# EAGLE board PC817 (EAGLE 9.5.0)
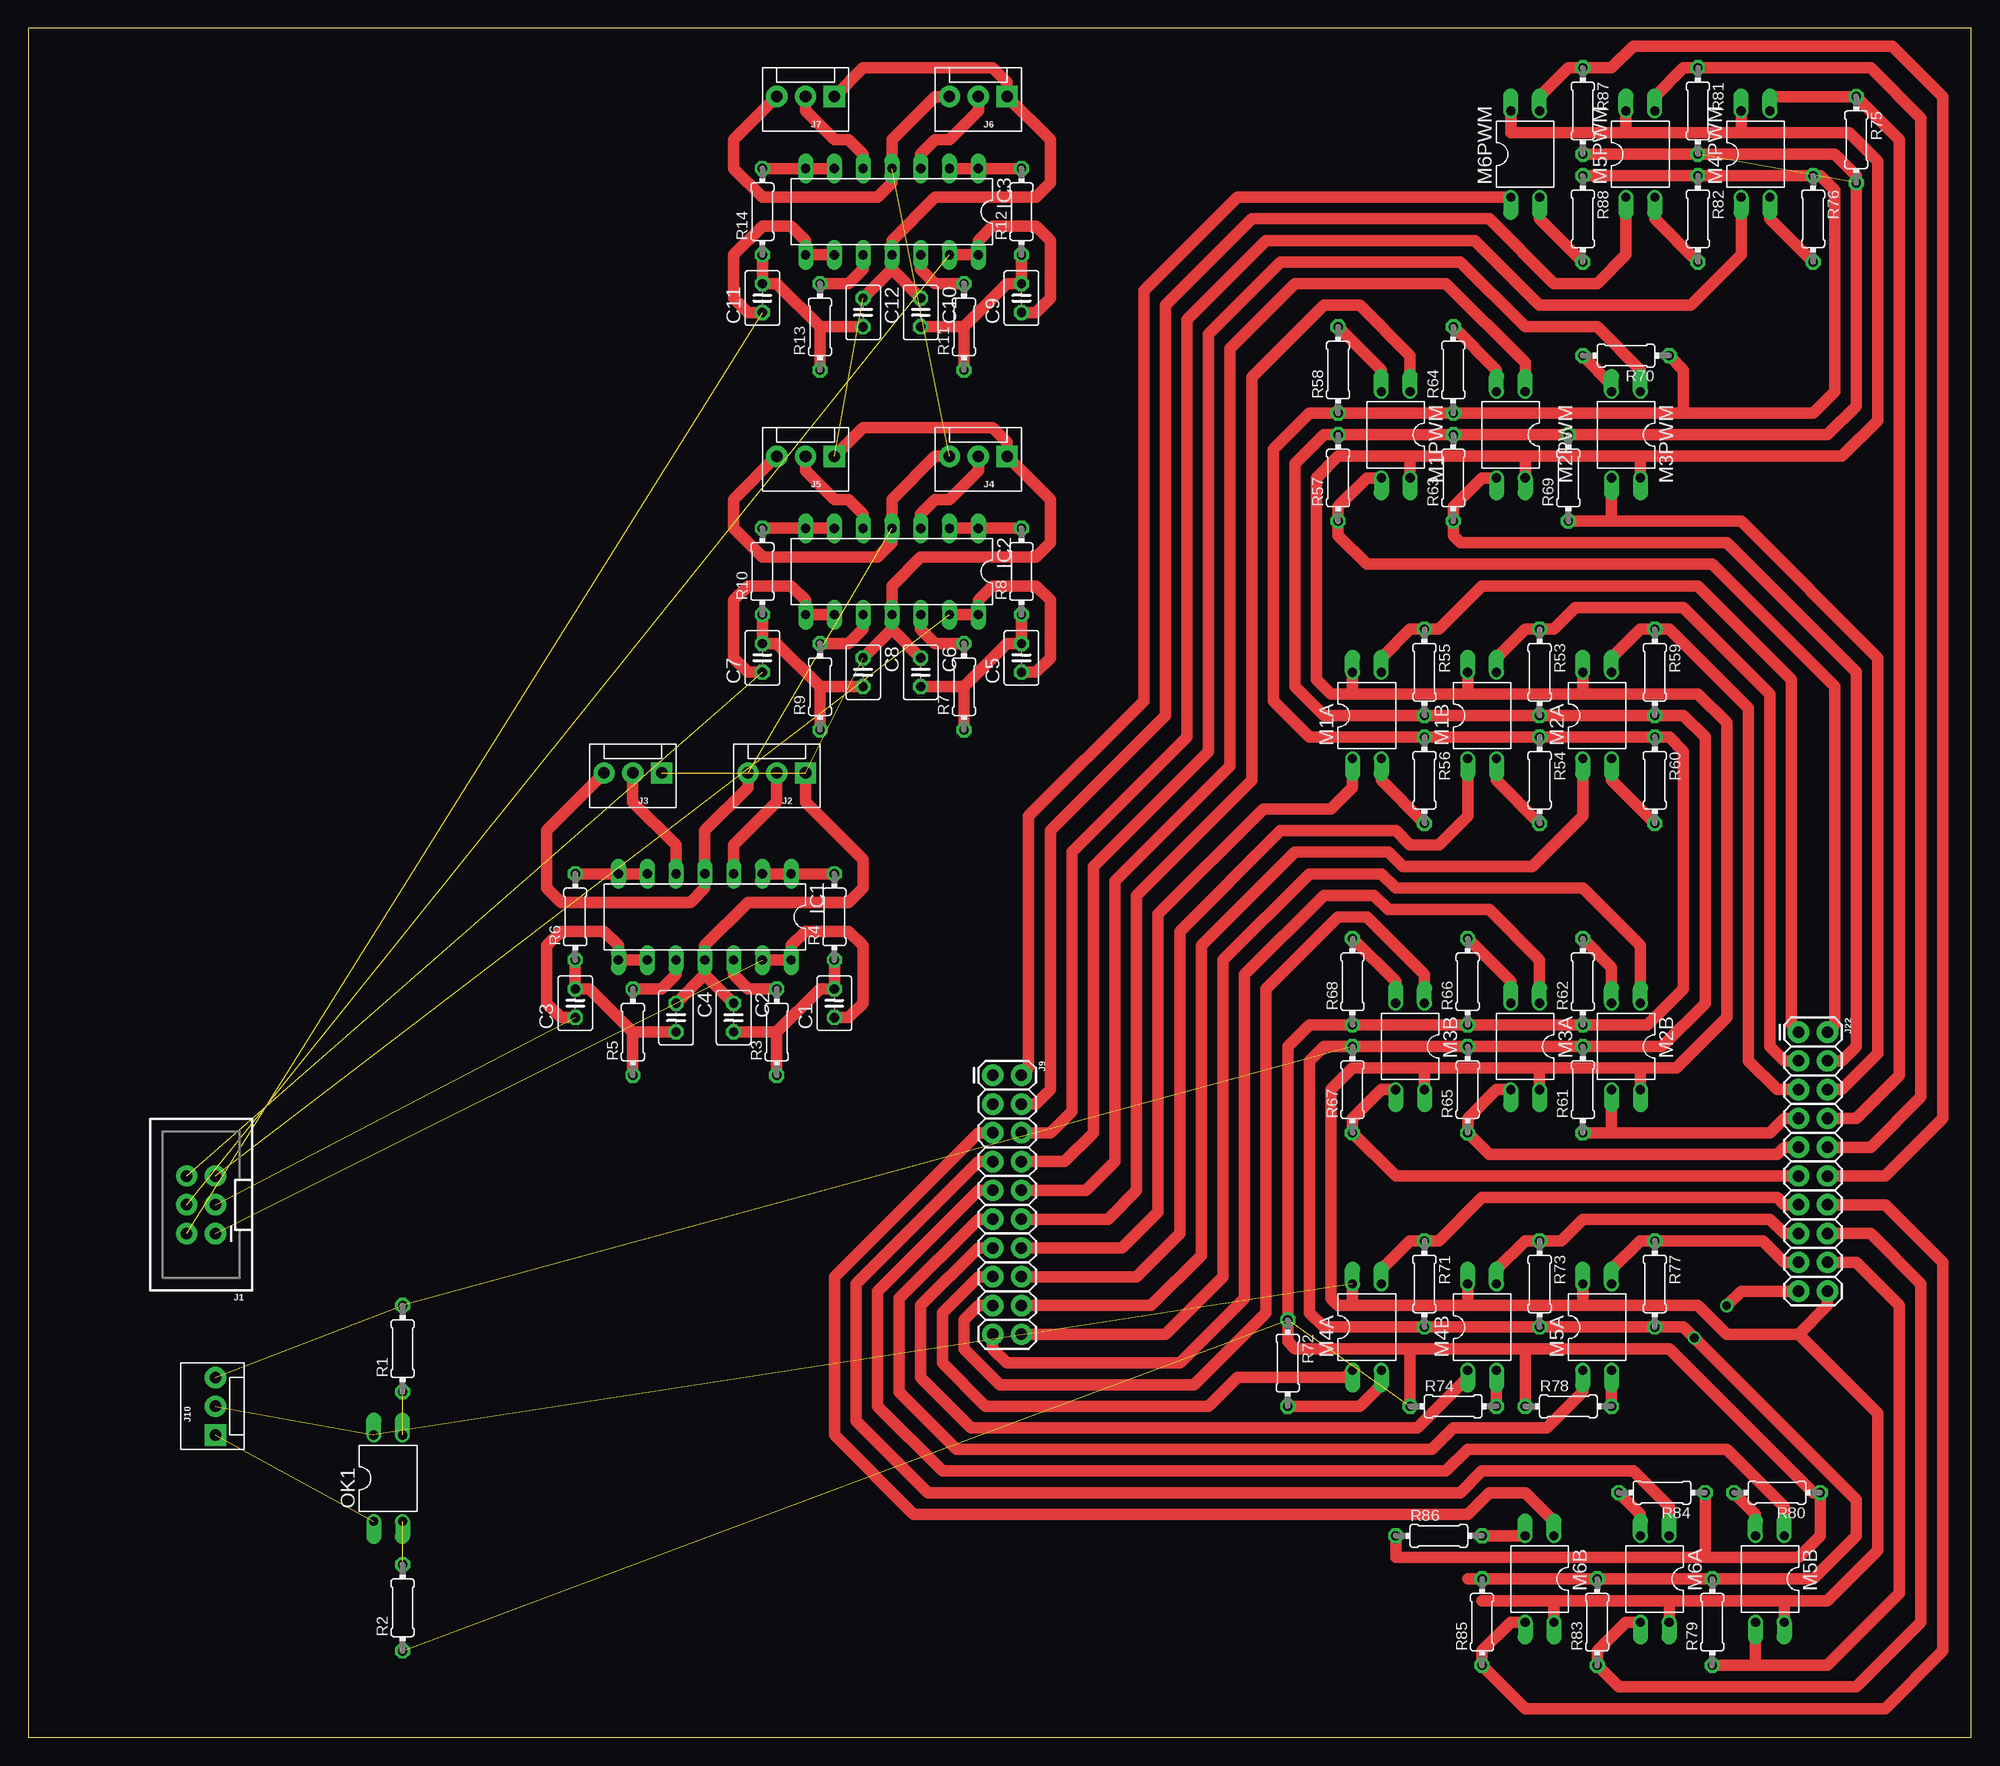
[diagram p0: board, top side]
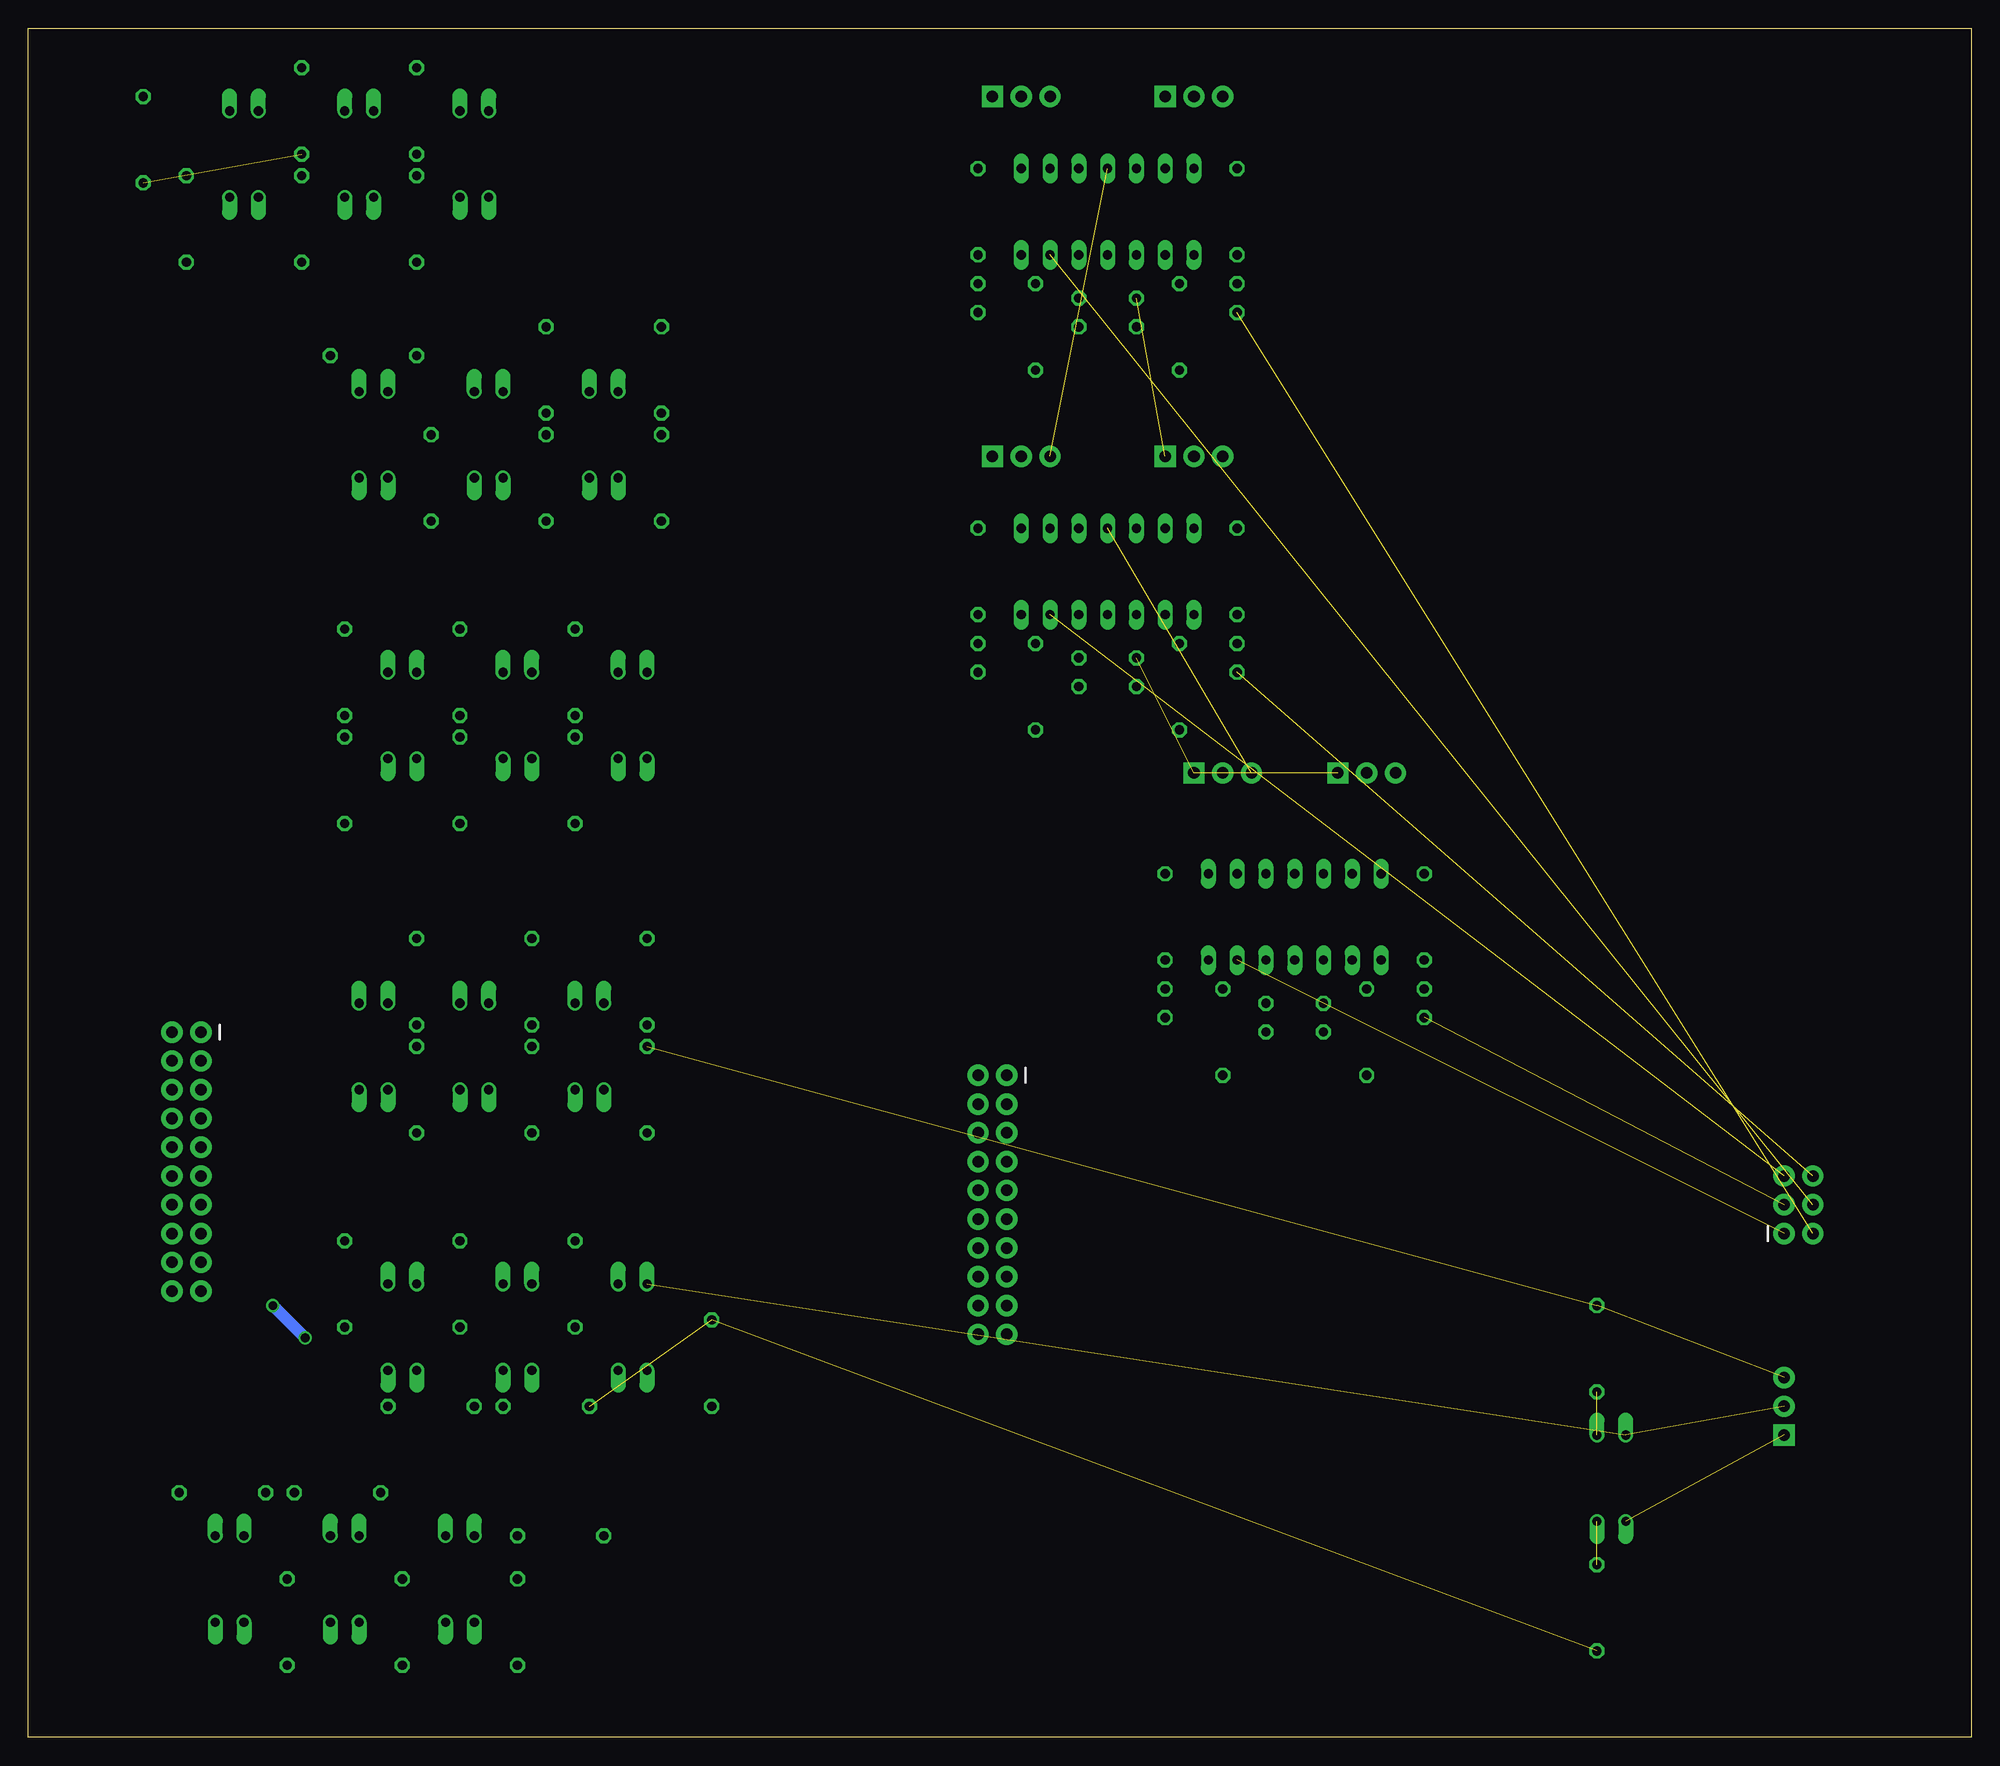
[diagram p1: board, bottom side, seen from below]

Size 171.43 x 150.8 mm. Coordinates in mm from the lower left corner, seen from the top.
Outline: 0,0 171.43,0 171.43,150.8 0,150.8 0,0
Copper layers (1*16): Top 0.035mm / dielectric 1.5mm / Bottom 0.035mm
Design rules "default": minimum track width 6mil, minimum drill 0.35mm, track to track 6mil, track to pad 6mil, pad to pad 6mil, via to via 6mil, smd to smd 6mil, copper to edge 40mil, drill to drill 6mil, minimum pad ring 10mil, minimum via ring 8mil, stop-mask expansion 4mil, vias tented up to drill 0mil, thermal gap 10mil
Net classes: 0 default: width 1.016 mm, drill 0.762 mm, clearance 0.508 mm

## Footprints (pad centres in the part's own frame; a part is rotated, then mirrored left to right if it is on the bottom)
C025-030X050 = drill 0.813 octagon: 1 -1.27,0; 2 1.27,0
DIL14 = drill 0.813 long: 1 -7.62,-3.81; 2 -5.08,-3.81; 3 -2.54,-3.81; 4 0,-3.81; 5 2.54,-3.81; 6 5.08,-3.81; 7 7.62,-3.81; 8 7.62,3.81; 9 5.08,3.81; 10 2.54,3.81; 11 0,3.81; 12 -2.54,3.81; 13 -5.08,3.81; 14 -7.62,3.81
2X3-SHROUDED = drill 1.016 pad 1.88: 1 -1.27,2.54; 2 1.27,2.54; 3 -1.27,0; 4 1.27,0; 5 -1.27,-2.54; 6 1.27,-2.54
MOLEX-1X3 = drill 1.016 pad 1.88 square: 1 0,0 | drill 1.016 pad 1.88: 2 2.54,0; 3 5.08,0
2X10 = drill 1.016 pad 1.88: 1 0,0; 2 0,2.54; 3 2.54,0; 4 2.54,2.54; 5 5.08,0; 6 5.08,2.54; 7 7.62,0; 8 7.62,2.54; 9 10.16,0; 10 10.16,2.54; 11 12.7,0; 12 12.7,2.54; 13 15.24,0; 14 15.24,2.54; 15 17.78,0; 16 17.78,2.54; 17 20.32,0; 18 20.32,2.54; 19 22.86,0; 20 22.86,2.54
DIL04 = drill 0.813 offset: 1 -1.27,-3.81; 2 1.27,-3.81; 3 1.27,3.81; 4 -1.27,3.81
0204/7 = drill 0.813 octagon: 1 -3.81,0; 2 3.81,0

## Placement (x,y rotation side)
C1  CS  [C025-030X050]  71.12,64.77 90 top
C2  CG  [C025-030X050]  62.23,63.5 270 top
C3  CS  [C025-030X050]  48.26,64.77 90 top
C4  CG  [C025-030X050]  57.15,63.5 270 top
C5  CS  [C025-030X050]  87.63,95.25 90 top
C6  CG  [C025-030X050]  78.74,93.98 270 top
C7  CS  [C025-030X050]  64.77,95.25 90 top
C8  CG  [C025-030X050]  73.66,93.98 270 top
C9  CS  [C025-030X050]  87.63,127 90 top
C10  CG  [C025-030X050]  78.74,125.73 270 top
C11  CS  [C025-030X050]  64.77,127 90 top
C12  CG  [C025-030X050]  73.66,125.73 270 top
IC1  MCP604P  [DIL14]  59.69,72.39 180 top
IC2  MCP604P  [DIL14]  76.2,102.87 180 top
IC3  MCP604P  [DIL14]  76.2,134.62 180 top
J1  [2X3-SHROUDED]  15.24,46.99 180 top
J2  [MOLEX-1X3]  68.58,85.09 180 top
J3  [MOLEX-1X3]  55.88,85.09 180 top
J4  [MOLEX-1X3]  86.36,113.03 180 top
J5  [MOLEX-1X3]  71.12,113.03 180 top
J6  [MOLEX-1X3]  86.36,144.78 180 top
J7  [MOLEX-1X3]  71.12,144.78 180 top
J9  [2X10]  85.09,58.42 270 top
J10  [MOLEX-1X3]  16.51,26.67 90 top
J22  [2X10]  156.21,62.23 270 top
M1A  PC817  [DIL04]  118.11,90.17 0 top
M1B  PC817  [DIL04]  128.27,90.17 0 top
M1PWM  PC817  [DIL04]  120.65,114.94 180 top
M2A  PC817  [DIL04]  138.43,90.17 0 top
M2B  PC817  [DIL04]  140.97,60.96 180 top
M2PWM  PC817  [DIL04]  130.81,114.94 180 top
M3A  PC817  [DIL04]  132.08,60.96 180 top
M3B  PC817  [DIL04]  121.92,60.96 180 top
M3PWM  PC817  [DIL04]  140.97,114.94 180 top
M4A  PC817  [DIL04]  118.11,36.2 0 top
M4B  PC817  [DIL04]  128.27,36.2 0 top
M4PWM  PC817  [DIL04]  152.4,139.7 0 top
M5A  PC817  [DIL04]  138.43,36.2 0 top
M5B  PC817  [DIL04]  153.67,13.97 180 top
M5PWM  PC817  [DIL04]  142.24,139.7 0 top
M6A  PC817  [DIL04]  143.51,13.97 180 top
M6B  PC817  [DIL04]  133.35,13.97 180 top
M6PWM  PC817  [DIL04]  132.08,139.7 0 top
OK1  PC817  [DIL04]  31.75,22.86 0 top
R1  1k  [0204/7]  33.02,34.29 90 top
R2  330  [0204/7]  33.02,11.43 90 top
R3  R+  [0204/7]  66.04,62.23 90 top
R4  RS  [0204/7]  71.12,72.39 90 top
R5  R+  [0204/7]  53.34,62.23 90 top
R6  RS  [0204/7]  48.26,72.39 90 top
R7  R+  [0204/7]  82.55,92.71 90 top
R8  RS  [0204/7]  87.63,102.87 90 top
R9  R+  [0204/7]  69.85,92.71 90 top
R10  RS  [0204/7]  64.77,102.87 90 top
R11  R+  [0204/7]  82.55,124.46 90 top
R12  RS  [0204/7]  87.63,134.62 90 top
R13  R+  [0204/7]  69.85,124.46 90 top
R14  RS  [0204/7]  64.77,134.62 90 top
R53  1k  [0204/7]  133.35,93.98 270 top
R54  330  [0204/7]  133.35,84.45 270 top
R55  1k  [0204/7]  123.19,93.98 270 top
R56  330  [0204/7]  123.19,84.45 270 top
R57  1k  [0204/7]  115.57,111.12 90 top
R58  330  [0204/7]  115.57,120.65 90 top
R59  1k  [0204/7]  143.51,93.98 270 top
R60  330  [0204/7]  143.51,84.45 270 top
R61  1k  [0204/7]  137.16,57.15 90 top
R62  330  [0204/7]  137.16,66.67 90 top
R63  1k  [0204/7]  125.73,111.12 90 top
R64  330  [0204/7]  125.73,120.65 90 top
R65  1k  [0204/7]  127,57.15 90 top
R66  330  [0204/7]  127,66.67 90 top
R67  1k  [0204/7]  116.84,57.15 90 top
R68  330  [0204/7]  116.84,66.67 90 top
R69  1k  [0204/7]  135.89,111.12 90 top
R70  330  [0204/7]  140.97,121.92 180 top
R71  1k  [0204/7]  123.19,40.01 270 top
R72  330  [0204/7]  111.12,33.02 270 top
R73  1k  [0204/7]  133.35,40.01 270 top
R74  330  [0204/7]  125.73,29.21 0 top
R75  1k  [0204/7]  161.29,140.97 270 top
R76  330  [0204/7]  157.48,133.99 270 top
R77  1k  [0204/7]  143.51,40.01 270 top
R78  330  [0204/7]  135.89,29.21 0 top
R79  1k  [0204/7]  148.59,10.16 90 top
R80  330  [0204/7]  154.31,21.59 180 top
R81  1k  [0204/7]  147.32,143.51 270 top
R82  330  [0204/7]  147.32,133.99 270 top
R83  1k  [0204/7]  138.43,10.16 90 top
R84  330  [0204/7]  144.15,21.59 180 top
R85  1k  [0204/7]  128.27,10.16 90 top
R86  330  [0204/7]  124.46,17.78 0 top
R87  1k  [0204/7]  137.16,143.51 270 top
R88  330  [0204/7]  137.16,133.99 270 top

## Library data of the parts
C1-C12 = rcl; SPICEPREFIX: C
IC1-IC3 = linear
J1 = SparkFun-Connectors; PROD_ID: CONN-10681; SF_ID: PRT_10877
J2-J7 J10 = SparkFun-Connectors; PROD_ID: CONN-08625; SF_ID: PRT-08096
J9 J22 = SparkFun-Connectors
M1A M1B M1PWM M2A M2B M2PWM M3A M3B M3PWM M4A M4B M4PWM M5A M5B M5PWM M6A M6B M6PWM OK1 = optocoupler; MPN: PC817X4J000F; OC_FARNELL: 9707727; OC_NEWARK: 97K7059
R1-R14 R53-R88 = rcl; SPICEPREFIX: R

## Nets
5V: J10.2 J22.20 M1A.4 M1B.4 M1PWM.4 M2A.4 M2B.4 M2PWM.4 M3A.4 M3B.4 M3PWM.4 M4A.4 M4B.4 M4PWM.4 M5A.4 M5B.4 M5PWM.4 M6A.4 M6B.4 M6PWM.4 OK1.4
+5V: IC1.4 IC2.4 IC3.4 J2.3 J3.3 J4.3 J5.3 J6.3 J7.3
AM1A: J9.14 M1A.1
AM1B: J9.16 M1B.1
AM1POT: C1.1 IC1.13 IC1.14 J1.1
AM1PWM: J9.12 M1PWM.1
AM2A: J9.18 M2A.1
AM2B: J9.20 M2B.1
AM2POT: C3.1 IC1.8 IC1.9 J1.3
AM2PWM: J9.10 M2PWM.1
AM3A: J9.19 M3A.1
AM3B: J9.17 M3B.1
AM3POT: C5.1 IC2.13 IC2.14 J1.5
AM3PWM: J9.8 M3PWM.1
AM4A: J9.15 M4A.1
AM4B: J9.13 M4B.1
AM4POT: C7.1 IC2.8 IC2.9 J1.6
AM4PWM: J9.6 M4PWM.1
AM5A: J9.11 M5A.1
AM5B: J9.9 M5B.1
AM5POT: C9.1 IC3.13 IC3.14 J1.4
AM5PWM: J9.4 M5PWM.1
AM6A: J9.7 M6A.1
AM6B: J9.5 M6B.1
AM6POT: C11.1 IC3.8 IC3.9 J1.2
AM6PWM: J9.2 M6PWM.1
GND_ARD: R2.1 R54.1 R56.1 R58.1 R60.1 R62.1 R64.1 R66.1 R68.1 R70.1 R72.1 R74.1 R76.1 R78.1 R80.1 R82.1 R84.1 R86.1 R88.1
GND_EXT: J10.3 J22.19 R1.2 R53.2 R55.2 R57.2 R59.2 R61.2 R63.2 R65.2 R67.2 R69.2 R71.2 R73.2 R75.2 R77.2 R79.2 R81.2 R83.2 R85.2 R87.2
GNDA: C2.1 C4.1 C6.1 C8.1 C10.1 C12.1 IC1.11 IC2.11 IC3.11 J2.1 J3.1 J4.1 J5.1 J6.1 J7.1
M1A: J22.1 M1A.3 R55.1
M1B: J22.3 M1B.3 R53.1
M1POT: IC1.3 J2.2
M1PWM: J22.2 M1PWM.3 R57.1
M2A: J22.5 M2A.3 R59.1
M2B: J22.7 M2B.3 R61.1
M2POT: IC1.5 J3.2
M2PWM: J22.4 M2PWM.3 R63.1
M3A: J22.9 M3A.3 R65.1
M3B: J22.11 M3B.3 R67.1
M3POT: IC2.3 J4.2
M3PWM: J22.6 M3PWM.3 R69.1
M4A: J22.13 M4A.3 R71.1
M4B: J22.15 M4B.3 R73.1
M4POT: IC2.5 J5.2
M4PWM: J22.8 M4PWM.3 R75.1
M5A: J22.17 M5A.3 R77.1
M5B: J22.18 M5B.3 R79.1
M5POT: IC3.3 J6.2
M5PWM: J22.10 M5PWM.3 R81.1
M6A: J22.16 M6A.3 R83.1
M6B: J22.14 M6B.3 R85.1
M6POT: IC3.5 J7.2
M6PWM: J22.12 M6PWM.3 R87.1
N$1: IC1.10 R5.2
N$2: OK1.2 R2.2
N$3: C1.2 C2.2 R3.1 R4.1
N$4: IC1.1 IC1.2 R4.2
N$5: IC1.12 R3.2
N$7: IC2.6 IC2.7 R10.2
N$8: IC1.6 IC1.7 R6.2
N$13: C3.2 C4.2 R5.1 R6.1
N$14: IC2.12 R7.2
N$15: IC2.1 IC2.2 R8.2
N$20: C5.2 C6.2 R7.1 R8.1
N$21: IC2.10 R9.2
N$27: C7.2 C8.2 R9.1 R10.1
N$28: IC3.12 R11.2
N$29: IC3.1 IC3.2 R12.2
N$46: M1B.2 R54.2
N$49: M1A.2 R56.2
N$50: M1PWM.2 R58.2
N$51: J9.1
N$52: M2A.2 R60.2
N$53: J9.3
N$54: M2B.2 R62.2
N$56: M2PWM.2 R64.2
N$58: M3A.2 R66.2
N$60: M3B.2 R68.2
N$62: M3PWM.2 R70.2
N$64: M4A.2 R72.2
N$66: M4B.2 R74.2
N$68: M4PWM.2 R76.2
N$70: M5A.2 R78.2
N$72: M5B.2 R80.2
N$74: M5PWM.2 R82.2
N$76: M6A.2 R84.2
N$78: M6B.2 R86.2
N$80: M6PWM.2 R88.2
N$84: C9.2 C10.2 R11.1 R12.1
N$85: IC3.10 R13.2
N$86: IC3.6 IC3.7 R14.2
N$91: C11.2 C12.2 R13.1 R14.1
RESET: OK1.3 R1.1
RESETEXT: J10.1 OK1.1

## Tracks (layer width: path | path; a pad name or v marks a point on that pad's centre or on a via)
5V  (2 unrouted)
  Top 1.016: M4PWM.4 151.13,141.6 | 140.97,141.6 151.13,141.6 | 140.97,141.6 M5PWM.4 | 140.97,141.6 130.81,141.6 M6PWM.4 | M1PWM.4 121.92,113.03 | 121.92,113.03 132.08,113.03 | 132.08,113.03 M2PWM.4 | 132.08,113.03 142.24,113.03 | 142.24,113.03 M3PWM.4 | 151.13,141.6 160.66,141.6 163.19,139.06 163.19,116.2 160.02,113.03 142.24,113.03 | M4A.4 116.84,38.1 | 116.84,38.1 127,38.1 | 127,38.1 M4B.4 | 127,38.1 137.16,38.1 | M5A.4 137.16,38.1 | M1A.4 116.84,92.08 | 116.84,92.08 127,92.08 | 127,92.08 M1B.4 | 127,92.08 137.16,92.08 | M2A.4 137.16,92.08 | 154.94,12.06 M5B.4 154.94,8.89 | M3B.4 123.19,59.05 | 133.35,59.05 123.19,59.05 | 133.35,59.05 142.24,59.05 | M2B.4 142.24,59.05 | M3A.4 133.35,59.05 | 142.24,59.05 145.41,59.05 149.86,63.5 149.86,89.53 147.32,92.08 137.16,92.08 | 156.21,35.56 163.19,28.57 163.19,16.51 158.75,12.06 154.94,12.06 | 137.16,38.1 147.32,38.1 149.86,35.56 156.21,35.56 | 128.27,12.06 134.62,12.06 | 116.84,92.08 114.94,92.08 113.67,93.34 113.67,111.12 115.57,113.03 121.92,113.03 | 116.84,38.1 115.57,38.1 114.94,38.73 114.94,57.15 116.84,59.05 123.19,59.05 | 156.21,35.56 158.75,38.1 J22.20 | 134.62,12.06 M6B.4 | 134.62,12.06 144.78,12.06 | 144.78,12.06 154.94,12.06 | M6A.4 144.78,12.06
+5V  (2 unrouted)
  Top 1.016: J4.3 80.01,113.03 76.2,109.22 IC2.4 76.2,105.41 74.93,104.14 64.77,104.14 62.23,106.68 62.23,109.22 J5.3 | J6.3 80.01,144.78 76.2,140.97 IC3.4 76.2,137.16 74.93,135.89 64.77,135.89 62.23,138.43 62.23,140.97 J7.3 | J2.3 63.5,83.82 59.69,80.01 IC1.4 59.69,74.93 58.42,73.66 46.99,73.66 45.72,74.93 45.72,80.01 J3.3
AM1A
  Top 1.016: M1A.1 116.84,83.82 114.94,81.92 108.97,81.92 99.69,72.64 99.69,46.35 96.52,43.18 J9.14
AM1B
  Top 1.016: M1B.1 127,81.28 124.46,78.74 121.92,78.74 120.65,80.01 110.49,80.01 101.6,71.12 101.6,44.45 97.79,40.64 J9.16
AM1POT  (1 unrouted)
  Top 1.016: IC1.13 IC1.14 67.31,69.85 68.58,71.12 72.39,71.12 73.66,69.85 73.66,64.77 72.39,63.5 C1.1
AM1PWM
  Top 1.016: M1PWM.1 121.92,121.92 117.47,126.36 114.3,126.36 107.95,120.02 107.95,84.45 97.79,74.3 97.79,48.26 95.25,45.72 J9.12
AM2A
  Top 1.016: M2A.1 137.16,81.28 132.72,76.83 121.28,76.83 120.02,78.11 111.76,78.11 103.5,69.85 103.5,42.55 99.06,38.1 J9.18
AM2B
  Top 1.016: M2B.1 142.24,69.85 137.16,74.93 120.65,74.93 119.38,76.2 113.03,76.2 105.41,68.58 105.41,40.64 100.33,35.56 J9.20
AM2POT  (1 unrouted)
  Top 1.016: IC1.9 IC1.8 52.07,69.85 50.8,71.12 46.99,71.12 45.72,69.85 45.72,64.77 46.99,63.5 C3.1
AM2PWM
  Top 1.016: M2PWM.1 132.08,121.28 125.09,128.27 111.76,128.27 106.05,122.56 106.05,85.72 95.89,75.56 95.89,50.8 93.34,48.26 J9.10
AM3A
  Top 1.016: M3A.1 133.35,68.58 128.91,73.03 120.02,73.03 118.75,74.3 114.3,74.3 107.31,67.31 107.31,38.73 101.6,33.02 86.36,33.02 85.09,34.29 J9.19
AM3B
  Top 1.016: M3B.1 123.19,67.31 118.11,72.39 115.57,72.39 109.22,66.04 109.22,37.47 102.87,31.11 85.72,31.11 82.55,34.29 82.55,36.83 83.82,38.1 J9.17
AM3POT  (1 unrouted)
  Top 1.016: IC2.13 IC2.14 83.82,100.33 85.09,101.6 88.9,101.6 90.17,100.33 90.17,95.25 88.9,93.98 C5.1
AM3PWM
  Top 1.016: J9.8 91.44,50.8 93.98,53.34 93.98,76.83 104.14,87 104.14,123.83 110.49,130.18 126.36,130.18 132.08,124.46 138.43,124.46 142.24,120.65 M3PWM.1
AM4A
  Top 1.016: J9.15 83.82,40.64 80.64,37.47 80.64,33.02 84.45,29.21 104.14,29.21 106.68,31.75 116.2,31.75 M4A.1 116.84,31.92
AM4B
  Top 1.016: J9.13 83.82,43.18 78.74,38.1 78.74,31.75 83.19,27.3 122.56,27.3 127,31.75 M4B.1
AM4POT  (1 unrouted)
  Top 1.016: IC2.9 IC2.8 68.58,100.33 67.31,101.6 63.5,101.6 62.23,100.33 62.23,95.25 63.5,93.98 C7.1
AM4PWM
  Top 1.016: J9.6 90.17,53.34 92.08,55.24 92.08,78.11 102.23,88.27 102.23,125.09 109.22,132.08 127.64,132.08 133.35,126.36 146.69,126.36 151.13,130.81 M4PWM.1
AM5A
  Top 1.016: J9.11 83.82,45.72 76.83,38.73 76.83,30.48 81.92,25.4 123.83,25.4 125.73,27.3 133.99,27.3 137.16,30.48 M5A.1
AM5B
  Top 1.016: J9.9 83.82,48.26 74.93,39.37 74.93,29.21 80.64,23.5 125.09,23.5 127,25.4 149.86,25.4 154.94,20.32 M5B.1
AM5POT  (1 unrouted)
  Top 1.016: IC3.13 IC3.14 83.82,132.08 85.09,133.35 88.9,133.35 90.17,132.08 90.17,127 88.9,125.73 C9.1
AM5PWM
  Top 1.016: J9.4 88.9,55.88 90.17,57.15 90.17,80.01 100.33,90.17 100.33,126.36 107.95,133.99 128.91,133.99 134.62,128.27 138.43,128.27 140.97,130.81 M5PWM.1
AM6A
  Top 1.016: J9.7 83.82,50.8 73.03,40.01 73.03,27.94 79.38,21.59 126.36,21.59 128.27,23.5 141.6,23.5 144.78,20.32 M6A.1
AM6B
  Top 1.016: J9.5 83.82,53.34 71.12,40.64 71.12,26.67 78.11,19.68 127,19.68 128.91,21.59 132.08,21.59 134.62,19.05 M6B.1
AM6POT  (1 unrouted)
  Top 1.016: IC3.9 IC3.8 68.58,132.08 67.31,133.35 64.77,133.35 62.23,130.81 62.23,127 63.5,125.73 C11.1
AM6PWM
  Top 1.016: J9.2 88.27,59.05 88.27,81.28 98.42,91.44 98.42,127.64 106.68,135.89 M6PWM.1
GND_ARD  (2 unrouted)
  Top 1.016: R88.1 R82.1 R76.1 158.12,137.79 159.38,136.53 159.38,118.75 157.48,116.84 146.05,116.84 | 146.05,116.84 R64.1 R58.1 113.03,116.84 109.86,113.67 109.86,91.44 113.03,88.27 R56.1 R54.1 R60.1 144.78,88.27 146.05,87 146.05,66.04 142.88,62.87 R62.1 R66.1 R68.1 113.03,62.87 111.12,60.96 111.12,34.92 111.76,34.29 121.92,34.29 | R70.1 146.05,120.65 146.05,116.84 | 147.96,15.88 156.21,15.88 158.12,17.78 R80.1 157.48,21.59 144.78,34.29 132.08,34.29 | R84.1 147.96,15.88 | 121.92,34.29 132.08,34.29 | R78.1 132.08,34.29 | R74.1 121.92,34.29 | R86.1 120.65,15.88 147.96,15.88
GND_EXT  (via drill 0.76)  (3 unrouted)
  Top 1.016: R87.2 R81.2 159.38,139.7 161.29,137.79 161.29,117.47 158.75,114.94 R69.2 R63.2 R57.2 114.3,114.94 111.76,112.39 111.76,92.71 114.3,90.17 R55.2 R53.2 R59.2 146.05,90.17 147.96,88.27 147.96,64.77 144.15,60.96 R61.2 R65.2 R67.2 114.3,60.96 113.03,59.69 113.03,37.47 114.3,36.2 R71.2 R73.2 R77.2 146.05,36.2 v147,35.24 161.29,20.95 161.29,17.78 157.48,13.97 R79.2 R83.2 R85.2 127,13.97 | J22.19 151.13,39.37 v149.86,38.1
  Bottom 1.016: v149.86,38.1 v147,35.24
GNDA  (3 unrouted)
  Top 1.016: C10.1 76.2,129.54 | C12.1 76.2,129.54 | 76.2,129.54 IC3.11 76.2,132.08 80.01,135.89 88.9,135.89 90.17,137.16 90.17,140.97 J6.1 86.36,146.05 85.09,147.32 73.66,147.32 J7.1 | J2.1 68.58,82.55 73.66,77.47 73.66,74.93 72.39,73.66 63.5,73.66 59.69,69.85 IC1.11 59.69,67.31 | C2.1 59.69,67.31 | C4.1 59.69,67.31 | C8.1 76.2,97.79 | C6.1 76.2,97.79 | 76.2,97.79 IC2.11 76.2,101.6 78.74,104.14 88.9,104.14 90.17,105.41 90.17,109.22 J4.1 86.36,114.3 85.09,115.57 73.66,115.57 J5.1
M1A
  Top 1.016: M1A.3 119.38,95.25 121.92,97.79 R55.1 124.46,97.79 128.27,101.6 147.32,101.6 155.57,93.34 155.57,62.87 J22.1
M1B
  Top 1.016: M1B.3 129.54,95.25 132.08,97.79 R53.1 134.62,97.79 136.53,99.69 146.05,99.69 153.67,92.08 153.67,60.96 154.94,59.69 J22.3
M1POT
  Top 1.016: J2.2 66.04,82.55 62.23,78.74 IC1.3
M1PWM
  Top 1.016: M1PWM.3 118.11,111.12 115.57,108.58 R57.1 115.57,106.05 118.11,103.5 148.59,103.5 159.38,92.71 159.38,62.87 J22.2
M2A
  Top 1.016: M2A.3 139.7,95.25 142.24,97.79 R59.1 144.78,97.79 151.76,90.81 151.76,59.69 154.31,57.15 J22.5
M2B
  Top 1.016: R61.1 139.7,53.34 | M2B.3 139.7,53.34 | J22.7 154.94,54.61 153.67,53.34 139.7,53.34
M2POT
  Top 1.016: J3.2 53.34,82.55 57.15,78.74 IC1.5
M2PWM
  Top 1.016: M2PWM.3 128.27,111.12 125.73,108.58 R63.1 125.73,106.05 126.36,105.41 149.86,105.41 161.29,93.98 161.29,60.96 160.02,59.69 J22.4
M3A
  Top 1.016: M3A.3 129.54,57.15 127,54.61 R65.1 128.91,51.44 154.31,51.44 154.94,52.07 J22.9
M3B
  Top 1.016: M3B.3 119.38,57.15 116.84,54.61 R67.1 120.65,49.53 J22.11
M3POT
  Top 1.016: IC2.3 78.74,107.95 80.01,109.22 81.28,109.22 83.82,111.76 J4.2
M3PWM
  Top 1.016: 139.7,107.31 R69.1 | M3PWM.3 139.7,107.31 | 139.7,107.31 151.13,107.31 163.19,95.25 163.19,60.33 160.02,57.15 J22.6
M4A
  Top 1.016: M4A.3 119.38,41.27 121.92,43.81 R71.1 124.46,43.81 128.27,47.62 154.31,47.62 154.94,46.99 J22.13
M4B
  Top 1.016: M4B.3 129.54,41.27 132.08,43.81 R73.1 135.25,43.81 137.16,45.72 153.67,45.72 154.94,44.45 J22.15
M4POT
  Top 1.016: IC2.5 73.66,107.95 72.39,109.22 71.12,109.22 68.58,111.76 J5.2
M4PWM
  Top 1.016: M4PWM.3 153.67,144.78 R75.1 165.1,140.97 165.1,58.42 161.29,54.61 J22.8
M5A
  Top 1.016: M5A.3 139.7,41.27 142.24,43.81 R77.1 153.03,43.81 154.94,41.91 J22.17
M5B
  Top 1.016: 152.4,6.35 R79.1 | M5B.3 152.4,6.35 | 152.4,6.35 158.75,6.35 165.1,12.7 165.1,38.1 161.29,41.91 J22.18
M5POT
  Top 1.016: IC3.3 78.74,139.7 80.01,140.97 81.28,140.97 83.82,143.51 J6.2
M5PWM
  Top 1.016: M5PWM.3 143.51,144.78 146.05,147.32 R81.1 162.56,147.32 167,142.88 167,56.52 162.56,52.07 J22.10
M6A
  Top 1.016: M6A.3 140.97,10.16 138.43,7.62 R83.1 140.34,4.45 161.29,4.45 167,10.16 167,40.01 162.56,44.45 J22.16
M6B
  Top 1.016: M6B.3 130.81,10.16 128.27,7.62 R85.1 132.08,2.54 163.83,2.54 168.91,7.62 168.91,41.91 163.83,46.99 J22.14
M6POT
  Top 1.016: J7.2 68.58,143.51 71.12,140.97 72.39,140.97 73.66,139.7 IC3.5
M6PWM
  Top 1.016: M6PWM.3 133.35,144.78 135.89,147.32 R87.1 139.7,147.32 141.6,149.22 164.47,149.22 168.91,144.78 168.91,54.61 163.83,49.53 J22.12
N$1
  Top 1.016: IC1.10 57.15,67.31 55.88,66.04 R5.2
N$2  (1 unrouted)
N$3
  Top 1.016: R4.1 C1.2 69.85,66.04 66.04,62.23 | 66.04,62.23 R3.1 | C2.2 66.04,62.23
N$4
  Top 1.016: IC1.2 IC1.1 R4.2
N$5
  Top 1.016: IC1.12 62.23,67.31 63.5,66.04 R3.2
N$7
  Top 1.016: IC2.6 IC2.7 R10.2
N$8
  Top 1.016: R6.2 IC1.7 IC1.6
N$13
  Top 1.016: R6.1 C3.2 49.53,66.04 53.34,62.23 | 53.34,62.23 R5.1 | 53.34,62.23 C4.2
N$14
  Top 1.016: IC2.12 78.74,97.79 80.01,96.52 R7.2
N$15
  Top 1.016: IC2.2 IC2.1 R8.2
N$20
  Top 1.016: R8.1 C5.2 86.36,96.52 82.55,92.71 | C6.2 82.55,92.71 | R7.1 82.55,92.71
N$21
  Top 1.016: R9.2 72.39,96.52 73.66,97.79 IC2.10
N$27
  Top 1.016: R10.1 C7.2 66.04,96.52 69.85,92.71 | 69.85,92.71 R9.1 | 69.85,92.71 C8.2
N$28
  Top 1.016: IC3.12 78.74,129.54 80.01,128.27 R11.2
N$29
  Top 1.016: IC3.2 IC3.1 R12.2
N$46
  Top 1.016: R54.2 129.54,84.45 M1B.2
N$49
  Top 1.016: R56.2 119.38,84.45 M1A.2
N$50
  Top 1.016: R58.2 119.38,120.65 M1PWM.2
N$52
  Top 1.016: R60.2 139.7,84.45 M2A.2
N$54
  Top 1.016: R62.2 139.7,67.94 M2B.2
N$56
  Top 1.016: R64.2 129.54,120.65 M2PWM.2
N$58
  Top 1.016: R66.2 130.81,66.67 M3A.2
N$60
  Top 1.016: R68.2 120.65,66.67 M3B.2
N$62
  Top 1.016: R70.2 139.7,119.38 M3PWM.2
N$64
  Top 1.016: R72.2 117.47,29.21 119.38,31.11 M4A.2
N$66
  Top 1.016: R74.2 M4B.2
N$68
  Top 1.016: R76.2 153.67,133.99 M4PWM.2
N$70
  Top 1.016: R78.2 M5A.2
N$72
  Top 1.016: R80.2 152.4,19.68 M5B.2
N$74
  Top 1.016: R82.2 143.51,133.99 M5PWM.2
N$76
  Top 1.016: R84.2 142.24,19.68 M6A.2
N$78
  Top 1.016: R86.2 M6B.2
N$80
  Top 1.016: R88.2 133.35,133.99 M6PWM.2
N$84
  Top 1.016: R12.1 C9.2 86.36,128.27 82.55,124.46 | 82.55,124.46 R11.1 | 82.55,124.46 C10.2
N$85
  Top 1.016: IC3.10 73.66,129.54 72.39,128.27 R13.2
N$86
  Top 1.016: R14.2 IC3.7 IC3.6
N$91
  Top 1.016: R14.1 C11.2 66.04,128.27 69.85,124.46 | 69.85,124.46 R13.1 | 69.85,124.46 C12.2
RESET  (1 unrouted)
RESETEXT  (1 unrouted)